# EAGLE board 20120508_Melody_Timer_4 (EAGLE 5.11)
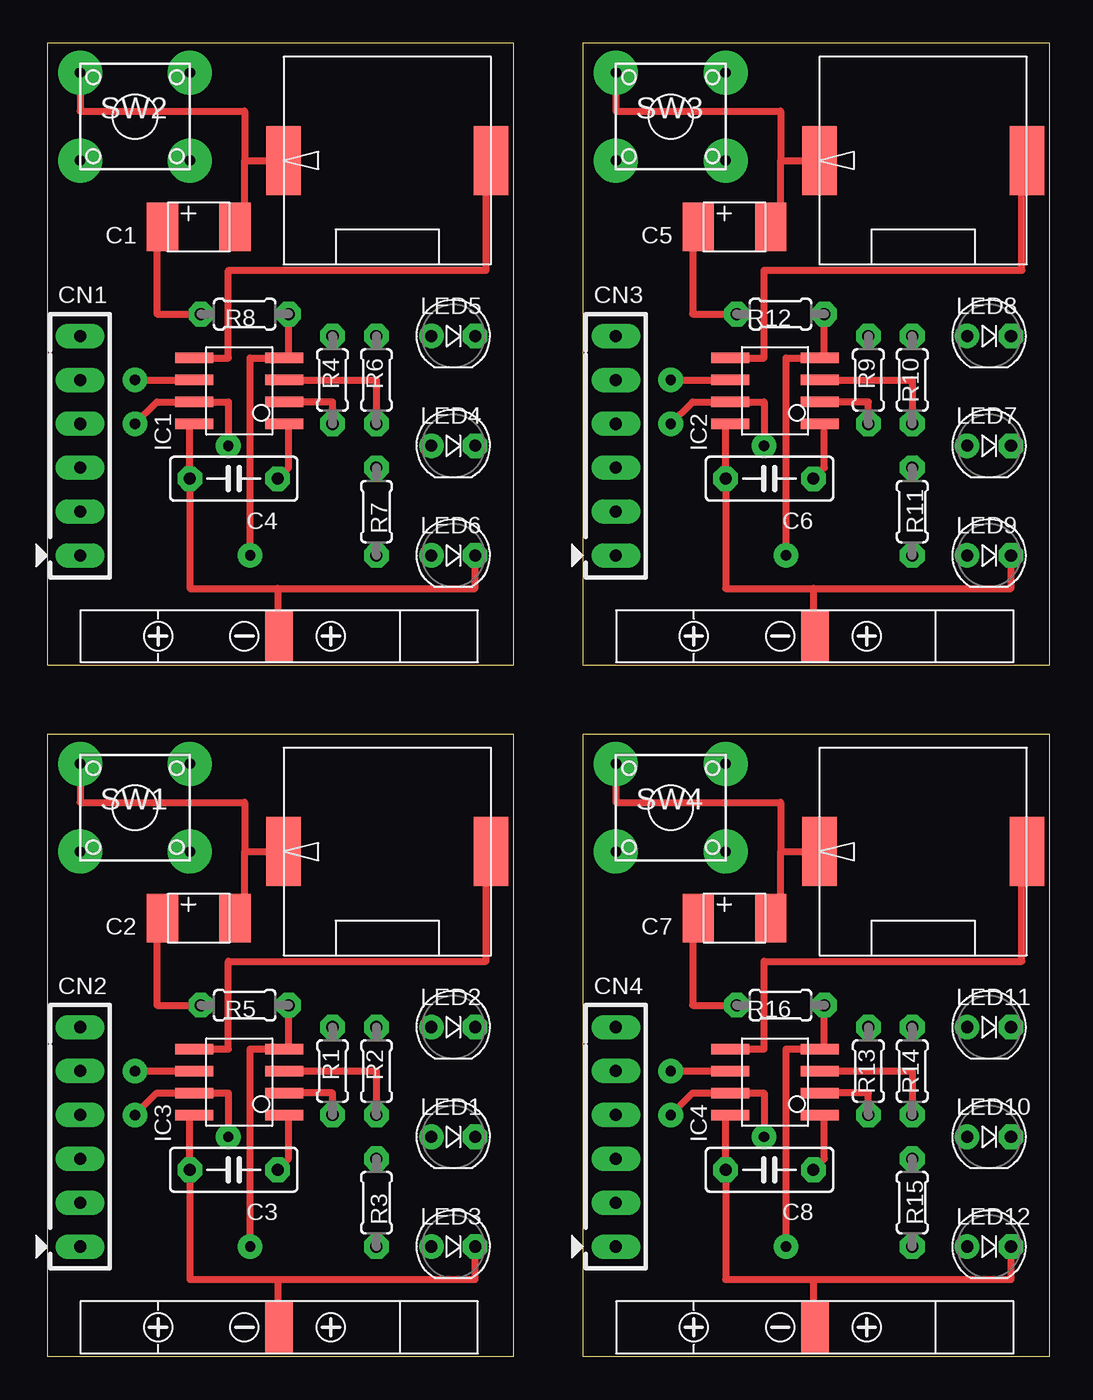
[diagram p0: board, top side]
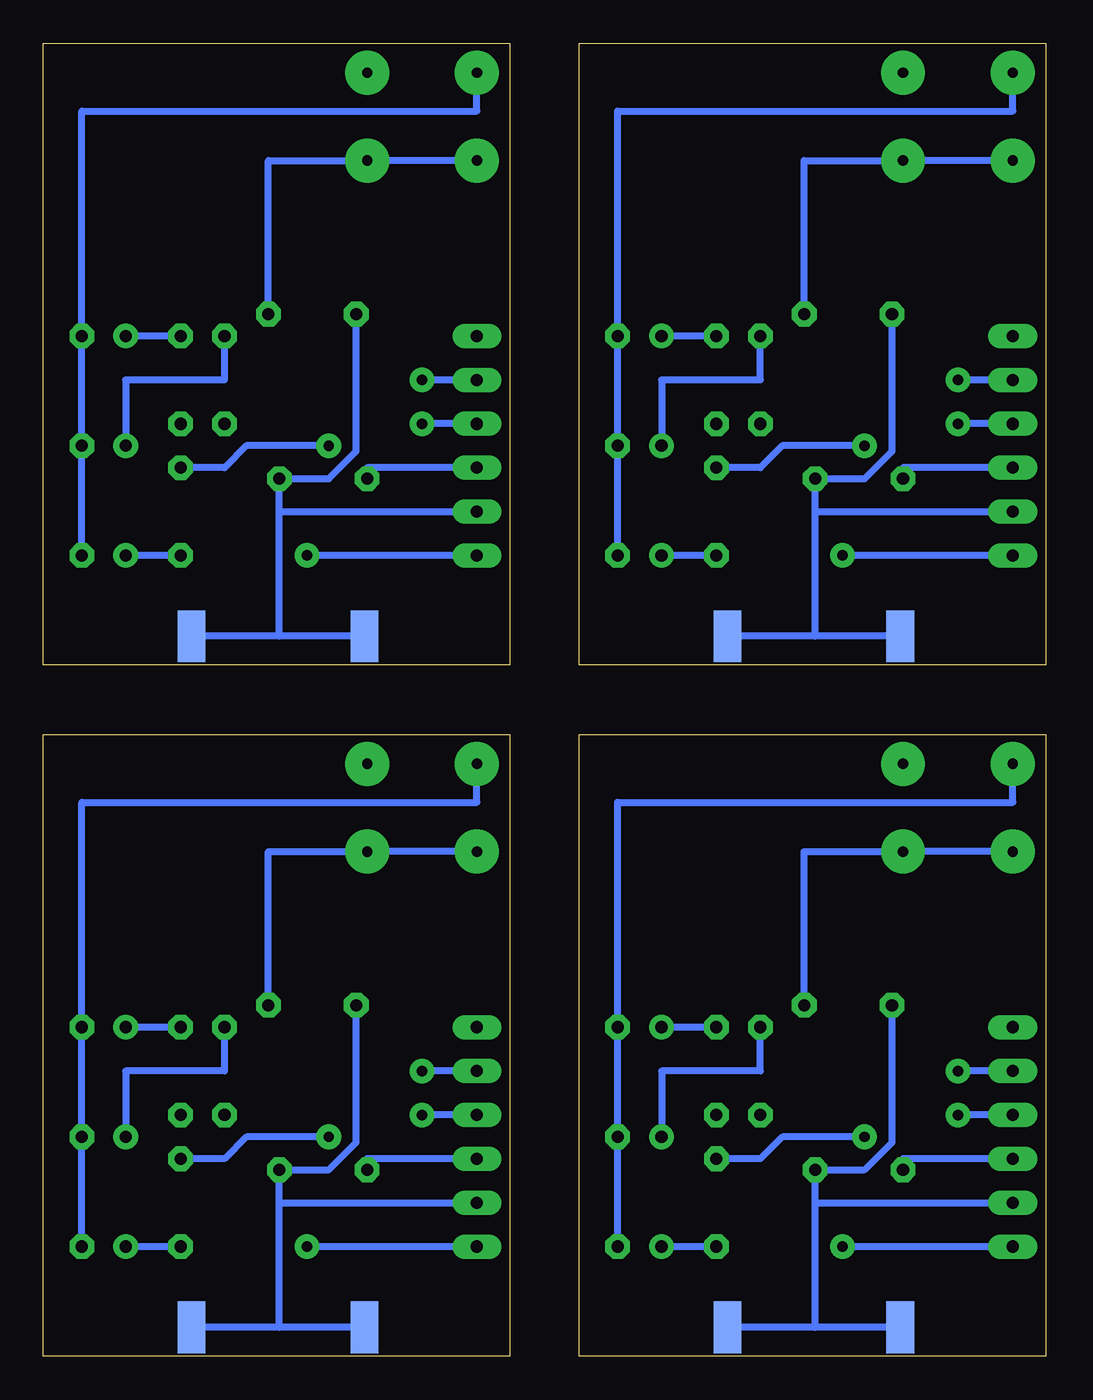
[diagram p1: board, bottom side, seen from below]

Size 58 x 76 mm. Coordinates in mm from the lower left corner, seen from the top.
Outline: 0,0 27,0 27,36 0,36 0,0
Outline: 0,40 27,40 27,76 0,76 0,40
Outline: 31,40 58,40 58,76 31,76 31,40
Outline: 31,0 58,0 58,36 31,36 31,0
Copper layers (1*16): Top 0.035mm / dielectric 1.5mm / Bottom 0.035mm
Design rules "default": minimum track width 10mil, minimum drill 24mil, track to track 8mil, track to pad 8mil, pad to pad 8mil, via to via 8mil, smd to smd 8mil, copper to edge 40mil, drill to drill 8mil, minimum pad ring 10mil, minimum via ring 8mil, stop-mask expansion 4mil, vias tented up to drill 0mil, thermal gap 10mil
Net classes: 0 default: width 0.406 mm, clearance 0.254 mm; 1 power: width 0.508 mm, clearance 0.254 mm

## Footprints (pad centres in the part's own frame; a part is rotated, then mirrored left to right if it is on the bottom)
BT_CR2032_VERT_B1 = smd 3 x 1.6 bottom: +1 -1.5,5; +2 -1.5,-5 | smd 3 x 1.6: - -1.5,0
BZ_MURATA_PKLCS_1212E4001 = smd 2 x 4: P$1 -6,0; P$2 6,0
M3528P = smd 1.8 x 2.8: + -2.105,0.005; - 2.095,0.005
C050-025X075-A = drill 0.7 pad 1.422 octagon: 1 -2.54,0; 2 2.54,0
CON_HRS_DIP_6B = drill 0.7 pad 1.422 long: 1 -6.35,0; 2 -3.81,0; 3 -1.27,0; 4 1.27,0; 5 3.81,0; 6 6.35,0
SO-08A = smd 0.6 x 2.2: 1 -1.905,-2.6; 2 -0.635,-2.6; 3 0.635,-2.6; 4 1.905,-2.6; 5 1.905,2.6; 6 0.635,2.6; 7 -0.635,2.6; 8 -1.905,2.6
LED_3MM_VIRT_2 = drill 0.7 pad 1.422 round: A -1.27,0 | drill 0.7 pad 1.422 octagon: K 1.27,0
0204/5-A = drill 0.7 pad 1.422 octagon: 1 -2.54,0; 2 2.54,0
SW_TACT = drill 0.6 pad 2.54 round: 1 -3.175,2.54; 2 3.175,2.54; 3 -3.175,-2.54; 4 3.175,-2.54

## Placement (x,y rotation side)
BT1  3.0V  [BT_CR2032_VERT_B1]  13.41,3.17 90 top
BT2  3.0V  [BT_CR2032_VERT_B1]  13.41,43.17 90 top
BT3  3.0V  [BT_CR2032_VERT_B1]  44.41,43.17 90 top
BT4  3.0V  [BT_CR2032_VERT_B1]  44.41,3.17 90 top
BZ1  [BZ_MURATA_PKLCS_1212E4001]  19.68,29.21 180 top
BZ2  [BZ_MURATA_PKLCS_1212E4001]  19.68,69.21 180 top
BZ3  [BZ_MURATA_PKLCS_1212E4001]  50.69,69.21 180 top
BZ4  [BZ_MURATA_PKLCS_1212E4001]  50.69,29.21 180 top
C1  47uF  [M3528P]  8.78,65.36 0 top
C2  47uF  [M3528P]  8.78,25.36 0 top
C3  0.1uF  [C050-025X075-A]  10.79,10.79 180 top
C4  0.1uF  [C050-025X075-A]  10.79,50.8 180 top
C5  47uF  [M3528P]  39.77,65.36 0 top
C6  0.1uF  [C050-025X075-A]  41.8,50.8 180 top
C7  47uF  [M3528P]  39.77,25.36 0 top
C8  0.1uF  [C050-025X075-A]  41.8,10.79 180 top
CN1  CON_6P_ICSPC  [CON_HRS_DIP_6B]  1.91,52.7 90 top
CN2  CON_6P_ICSPC  [CON_HRS_DIP_6B]  1.91,12.7 90 top
CN3  CON_6P_ICSPC  [CON_HRS_DIP_6B]  32.91,52.7 90 top
CN4  CON_6P_ICSPC  [CON_HRS_DIP_6B]  32.91,12.7 90 top
IC1  PIC12F683SNA  [SO-08A]  11.11,55.88 90 top
IC2  PIC12F683SNA  [SO-08A]  42.11,55.88 90 top
IC3  PIC12F683SNA  [SO-08A]  11.11,15.88 90 top
IC4  PIC12F683SNA  [SO-08A]  42.11,15.88 90 top
LED1  [LED_3MM_VIRT_2]  23.5,12.7 0 top
LED2  [LED_3MM_VIRT_2]  23.5,19.05 0 top
LED3  [LED_3MM_VIRT_2]  23.5,6.35 0 top
LED4  [LED_3MM_VIRT_2]  23.5,52.7 0 top
LED5  [LED_3MM_VIRT_2]  23.5,59.05 0 top
LED6  [LED_3MM_VIRT_2]  23.5,46.35 0 top
LED7  [LED_3MM_VIRT_2]  54.49,52.7 0 top
LED8  [LED_3MM_VIRT_2]  54.49,59.05 0 top
LED9  [LED_3MM_VIRT_2]  54.49,46.35 0 top
LED10  [LED_3MM_VIRT_2]  54.49,12.7 0 top
LED11  [LED_3MM_VIRT_2]  54.49,19.05 0 top
LED12  [LED_3MM_VIRT_2]  54.49,6.35 0 top
R1  470  [0204/5-A]  16.51,16.51 270 top
R2  470  [0204/5-A]  19.05,16.51 270 top
R3  470  [0204/5-A]  19.05,8.89 90 top
R4  470  [0204/5-A]  16.51,56.51 270 top
R5  10K  [0204/5-A]  11.43,20.32 180 top
R6  470  [0204/5-A]  19.05,56.51 270 top
R7  470  [0204/5-A]  19.05,48.89 90 top
R8  10K  [0204/5-A]  11.43,60.32 180 top
R9  470  [0204/5-A]  47.51,56.51 270 top
R10  470  [0204/5-A]  50.05,56.51 270 top
R11  470  [0204/5-A]  50.05,48.89 90 top
R12  10K  [0204/5-A]  42.43,60.32 180 top
R13  470  [0204/5-A]  47.51,16.51 270 top
R14  470  [0204/5-A]  50.05,16.51 270 top
R15  470  [0204/5-A]  50.05,8.89 90 top
R16  10K  [0204/5-A]  42.43,20.32 180 top
SW1  SW_TACT1  [SW_TACT]  5.08,31.75 0 top
SW2  SW_TACT1  [SW_TACT]  5.08,71.75 0 top
SW3  SW_TACT1  [SW_TACT]  36.08,71.75 0 top
SW4  SW_TACT1  [SW_TACT]  36.08,31.75 0 top

## Library data of the parts
BT1-BT4 BZ1-BZ4 C1-C8 CN1-CN4 IC1-IC4 LED1-LED12 R1-R16 SW1-SW4 = p20120508_Melody_Timer

## Nets
GND: BT1.- BZ1.P$2 C2.- C3.2 CN2.3 IC3.8 LED1.K LED2.K LED3.K SW1.1
GND1: BT2.- BZ2.P$2 C1.- C4.2 CN1.3 IC1.8 LED4.K LED5.K LED6.K SW2.1
GND2: BT3.- BZ3.P$2 C5.- C6.2 CN3.3 IC2.8 LED7.K LED8.K LED9.K SW3.1
GND3: BT4.- BZ4.P$2 C7.- C8.2 CN4.3 IC4.8 LED10.K LED11.K LED12.K SW4.1
N$1: CN1.5 IC1.6
N$2: CN2.5 IC3.6
N$3: CN2.4 IC3.7 R3.2
N$4: CN1.4 IC1.7 R7.2
N$5: BZ1.P$1 IC3.5
N$6: LED3.A R3.1
N$7: LED2.A R2.1
N$8: LED1.A R1.1
N$9: IC3.2 R1.2
N$10: IC3.3 R2.2
N$11: LED6.A R7.1
N$12: LED5.A R6.1
N$13: CN2.1 IC3.4 R5.1 SW1.3 SW1.4
N$14: LED4.A R4.1
N$15: IC1.2 R4.2
N$16: IC1.3 R6.2
N$17: BZ2.P$1 IC1.5
N$18: CN1.1 IC1.4 R8.1 SW2.3 SW2.4
N$19: CN3.5 IC2.6
N$20: CN3.4 IC2.7 R11.2
N$21: LED9.A R11.1
N$22: LED8.A R10.1
N$23: LED7.A R9.1
N$24: IC2.2 R9.2
N$25: IC2.3 R10.2
N$26: BZ3.P$1 IC2.5
N$27: CN3.1 IC2.4 R12.1 SW3.3 SW3.4
N$28: CN4.5 IC4.6
N$29: CN4.4 IC4.7 R15.2
N$30: LED12.A R15.1
N$31: LED11.A R14.1
N$32: LED10.A R13.1
N$33: IC4.2 R13.2
N$34: IC4.3 R14.2
N$35: BZ4.P$1 IC4.5
N$36: CN4.1 IC4.4 R16.1 SW4.3 SW4.4
VCC: BT1.+1 BT1.+2 C2.+ C3.1 CN2.2 IC3.1 R5.2
VCC1: BT2.+1 BT2.+2 C1.+ C4.1 CN1.2 IC1.1 R8.2
VCC2: BT3.+1 BT3.+2 C5.+ C6.1 CN3.2 IC2.1 R12.2
VCC3: BT4.+1 BT4.+2 C7.+ C8.1 CN4.2 IC4.1 R16.2

## Tracks (layer width: path | path; a pad name or v marks a point on that pad's centre or on a via)
GND
  Top 0.406: BT1.- 13.34,1.68 13.34,4.45 | 13.34,4.45 24.77,4.45 LED3.K | IC3.8 8.26,13.97 C3.2 8.26,4.45 13.34,4.45 | 11.43,29.21 BZ1.P$2 | 11.43,29.21 11.43,32.07 1.91,32.07 SW1.1 | C2.- 11.43,25.36 11.43,29.21
  Bottom 0.406: LED3.K LED1.K LED2.K 24.77,32.07 1.91,32.07 SW1.1 | CN2.3 8.26,11.43 C3.2
GND1
  Top 0.406: BT2.- 13.34,41.67 13.34,44.45 | 13.34,44.45 24.77,44.45 LED6.K | IC1.8 8.26,53.97 C4.2 8.26,44.45 13.34,44.45 | 11.43,69.21 BZ2.P$2 | 11.43,69.21 11.43,72.07 1.91,72.07 SW2.1 | C1.- 11.43,65.36 11.43,69.21
  Bottom 0.406: LED6.K LED4.K LED5.K 24.77,72.07 1.91,72.07 SW2.1 | CN1.3 8.26,51.43 C4.2
GND2
  Top 0.406: BT3.- 44.34,41.67 44.34,44.45 | 44.34,44.45 55.77,44.45 LED9.K | IC2.8 39.26,53.97 C6.2 39.26,44.45 44.34,44.45 | 42.43,69.21 BZ3.P$2 | 42.43,69.21 42.43,72.07 32.91,72.07 SW3.1 | C5.- 42.43,65.36 42.43,69.21
  Bottom 0.406: LED9.K LED7.K LED8.K 55.77,72.07 32.91,72.07 SW3.1 | CN3.3 39.26,51.43 C6.2
GND3
  Top 0.406: BT4.- 44.34,1.68 44.34,4.45 | 44.34,4.45 55.77,4.45 LED12.K | IC4.8 39.26,13.97 C8.2 39.26,4.45 44.34,4.45 | 42.43,29.21 BZ4.P$2 | 42.43,29.21 42.43,32.07 32.91,32.07 SW4.1 | C7.- 42.43,25.36 42.43,29.21
  Bottom 0.406: LED12.K LED10.K LED11.K 55.77,32.07 32.91,32.07 SW4.1 | CN4.3 39.26,11.43 C8.2
N$1  (via drill 0.6 pad 1.42)
  Top 0.406: v5.08,56.51 IC1.6
  Bottom 0.406: CN1.5 v5.08,56.51
N$2  (via drill 0.6 pad 1.42)
  Top 0.406: v5.08,16.51 IC3.6
  Bottom 0.406: CN2.5 v5.08,16.51
N$3  (via drill 0.6 pad 1.42)
  Top 0.406: v10.48,12.7 10.48,15.24 IC3.7 6.35,15.24 v5.08,13.97
  Bottom 0.406: CN2.4 v5.08,13.97 | v10.48,12.7 15.24,12.7 16.51,11.43 R3.2
N$4  (via drill 0.6 pad 1.42)
  Top 0.406: v10.48,52.7 10.48,55.24 IC1.7 6.35,55.24 v5.08,53.97
  Bottom 0.406: CN1.4 v5.08,53.97 | v10.48,52.7 15.24,52.7 16.51,51.43 R7.2
N$5
  Top 0.406: IC3.5 10.48,17.78 10.48,22.86 25.4,22.86 25.4,28.93 BZ1.P$1
N$6
  Bottom 0.406: R3.1 LED3.A
N$7
  Bottom 0.406: R2.1 LED2.A
N$8
  Bottom 0.406: R1.1 16.51,16.51 22.23,16.51 LED1.A
N$9
  Top 0.406: IC3.2 16.51,15.24 R1.2
N$10
  Top 0.406: IC3.3 19.05,16.51 R2.2
N$11
  Bottom 0.406: R7.1 LED6.A
N$12
  Bottom 0.406: R6.1 LED5.A
N$13  (via drill 0.6 pad 1.42)
  Top 0.406: R5.1 13.97,17.78 IC3.4 11.75,17.78 v11.75,6.35
  Bottom 0.406: CN2.1 v11.75,6.35 | R5.1 13.97,29.21 SW1.4 SW1.3
N$14
  Bottom 0.406: R4.1 16.51,56.51 22.23,56.51 LED4.A
N$15
  Top 0.406: IC1.2 16.51,55.24 R4.2
N$16
  Top 0.406: IC1.3 19.05,56.51 R6.2
N$17
  Top 0.406: IC1.5 10.48,57.78 10.48,62.86 25.4,62.86 25.4,68.92 BZ2.P$1
N$18  (via drill 0.6 pad 1.42)
  Top 0.406: R8.1 13.97,57.78 IC1.4 11.75,57.78 v11.75,46.35
  Bottom 0.406: CN1.1 v11.75,46.35 | R8.1 13.97,69.21 SW2.4 SW2.3
N$19  (via drill 0.6 pad 1.42)
  Top 0.406: v36.08,56.51 IC2.6
  Bottom 0.406: CN3.5 v36.08,56.51
N$20  (via drill 0.6 pad 1.42)
  Top 0.406: v41.48,52.7 41.48,55.24 IC2.7 37.35,55.24 v36.08,53.97
  Bottom 0.406: CN3.4 v36.08,53.97 | v41.48,52.7 46.24,52.7 47.51,51.43 R11.2
N$21
  Bottom 0.406: R11.1 LED9.A
N$22
  Bottom 0.406: R10.1 LED8.A
N$23
  Bottom 0.406: R9.1 47.51,56.51 53.23,56.51 LED7.A
N$24
  Top 0.406: IC2.2 47.51,55.24 R9.2
N$25
  Top 0.406: IC2.3 50.05,56.51 R10.2
N$26
  Top 0.406: IC2.5 41.48,57.78 41.48,62.86 56.4,62.86 56.4,68.92 BZ3.P$1
N$27  (via drill 0.6 pad 1.42)
  Top 0.406: R12.1 44.97,57.78 IC2.4 42.75,57.78 v42.75,46.35
  Bottom 0.406: CN3.1 v42.75,46.35 | R12.1 44.97,69.21 SW3.4 SW3.3
N$28  (via drill 0.6 pad 1.42)
  Top 0.406: v36.08,16.51 IC4.6
  Bottom 0.406: CN4.5 v36.08,16.51
N$29  (via drill 0.6 pad 1.42)
  Top 0.406: v41.48,12.7 41.48,15.24 IC4.7 37.35,15.24 v36.08,13.97
  Bottom 0.406: CN4.4 v36.08,13.97 | v41.48,12.7 46.24,12.7 47.51,11.43 R15.2
N$30
  Bottom 0.406: R15.1 LED12.A
N$31
  Bottom 0.406: R14.1 LED11.A
N$32
  Bottom 0.406: R13.1 47.51,16.51 53.23,16.51 LED10.A
N$33
  Top 0.406: IC4.2 47.51,15.24 R13.2
N$34
  Top 0.406: IC4.3 50.05,16.51 R14.2
N$35
  Top 0.406: IC4.5 41.48,17.78 41.48,22.86 56.4,22.86 56.4,28.93 BZ4.P$1
N$36  (via drill 0.6 pad 1.42)
  Top 0.406: R16.1 44.97,17.78 IC4.4 42.75,17.78 v42.75,6.35
  Bottom 0.406: CN4.1 v42.75,6.35 | R16.1 44.97,29.21 SW4.4 SW4.3
VCC
  Top 0.406: IC3.1 13.97,13.97 13.97,11.43 C3.1 | C2.+ 6.35,25.36 6.35,20.32 R5.2
  Bottom 0.406: 13.34,1.68 13.34,8.89 | 13.34,8.89 C3.1 10.48,10.79 8.89,12.38 R5.2 | 13.34,8.89 CN2.2 | BT1.+1 13.34,1.68 | 13.34,1.68 BT1.+2
VCC1
  Top 0.406: IC1.1 13.97,53.97 13.97,51.43 C4.1 | C1.+ 6.35,65.36 6.35,60.32 R8.2
  Bottom 0.406: 13.34,41.67 13.34,48.89 | 13.34,48.89 C4.1 10.48,50.8 8.89,52.38 R8.2 | 13.34,48.89 CN1.2 | BT2.+1 13.34,41.67 | 13.34,41.67 BT2.+2
VCC2
  Top 0.406: IC2.1 44.97,53.97 44.97,51.43 C6.1 | C5.+ 37.35,65.36 37.35,60.32 R12.2
  Bottom 0.406: 44.34,41.67 44.34,48.89 | 44.34,48.89 C6.1 41.48,50.8 39.89,52.38 R12.2 | 44.34,48.89 CN3.2 | BT3.+1 44.34,41.67 | 44.34,41.67 BT3.+2
VCC3
  Top 0.406: IC4.1 44.97,13.97 44.97,11.43 C8.1 | C7.+ 37.35,25.36 37.35,20.32 R16.2
  Bottom 0.406: 44.34,1.68 44.34,8.89 | 44.34,8.89 C8.1 41.48,10.79 39.89,12.38 R16.2 | 44.34,8.89 CN4.2 | BT4.+1 44.34,1.68 | 44.34,1.68 BT4.+2